# Altium PCB PISCES_200.PCBDOC
Units mm, origin at the board's own origin, x right, y up, seen from the top; angles counter-clockwise.
Board outline 126.04 x 85.33 mm, 4 copper layers (Top Layer, GND, POWER, Bottom Layer); 67 components, 45 nets, 205 pads, 121 vias.
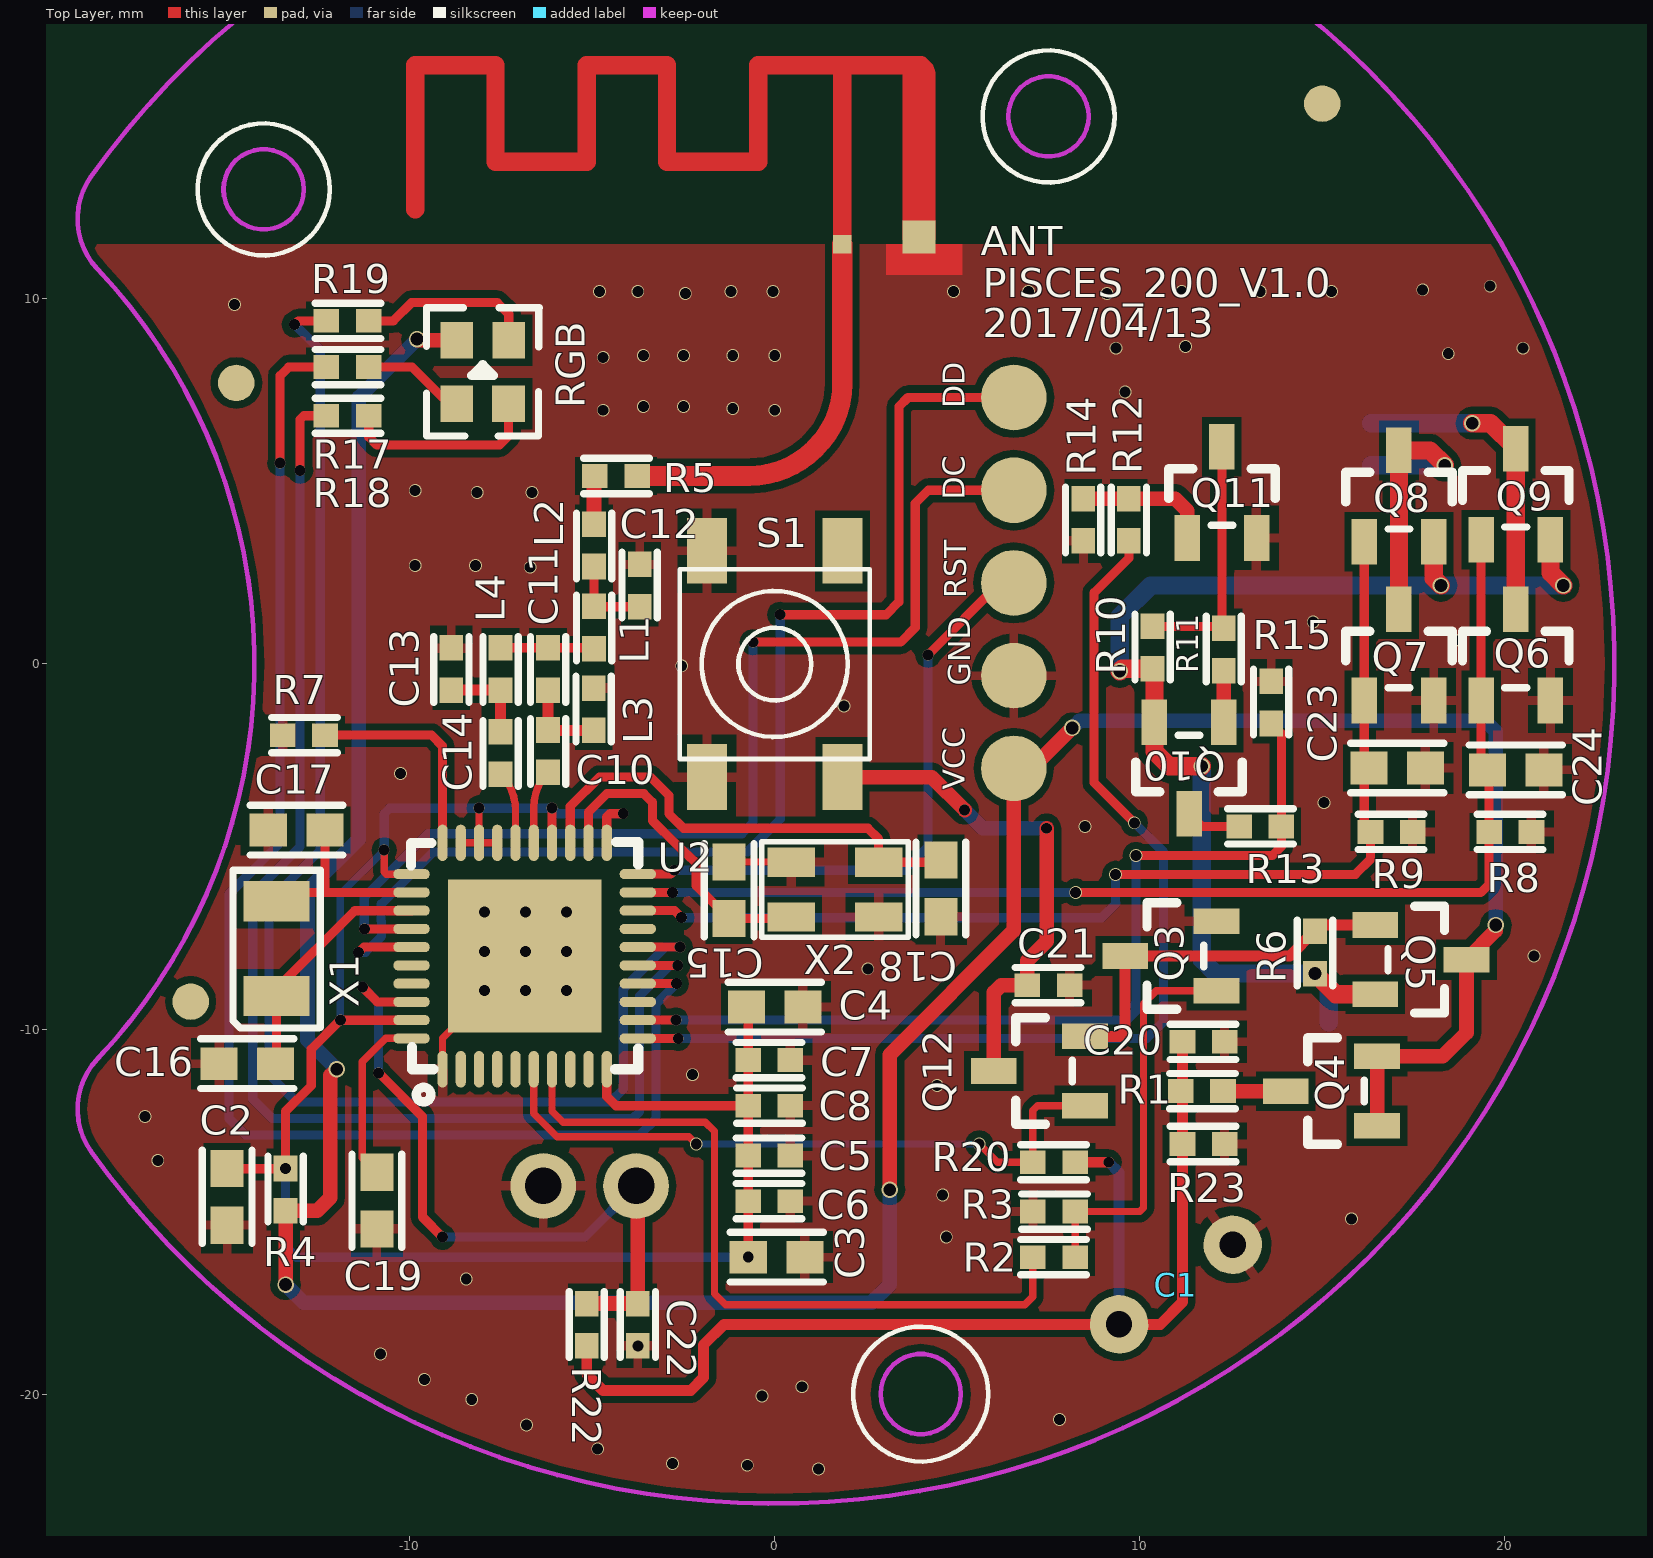
[diagram p0: Top Layer view]
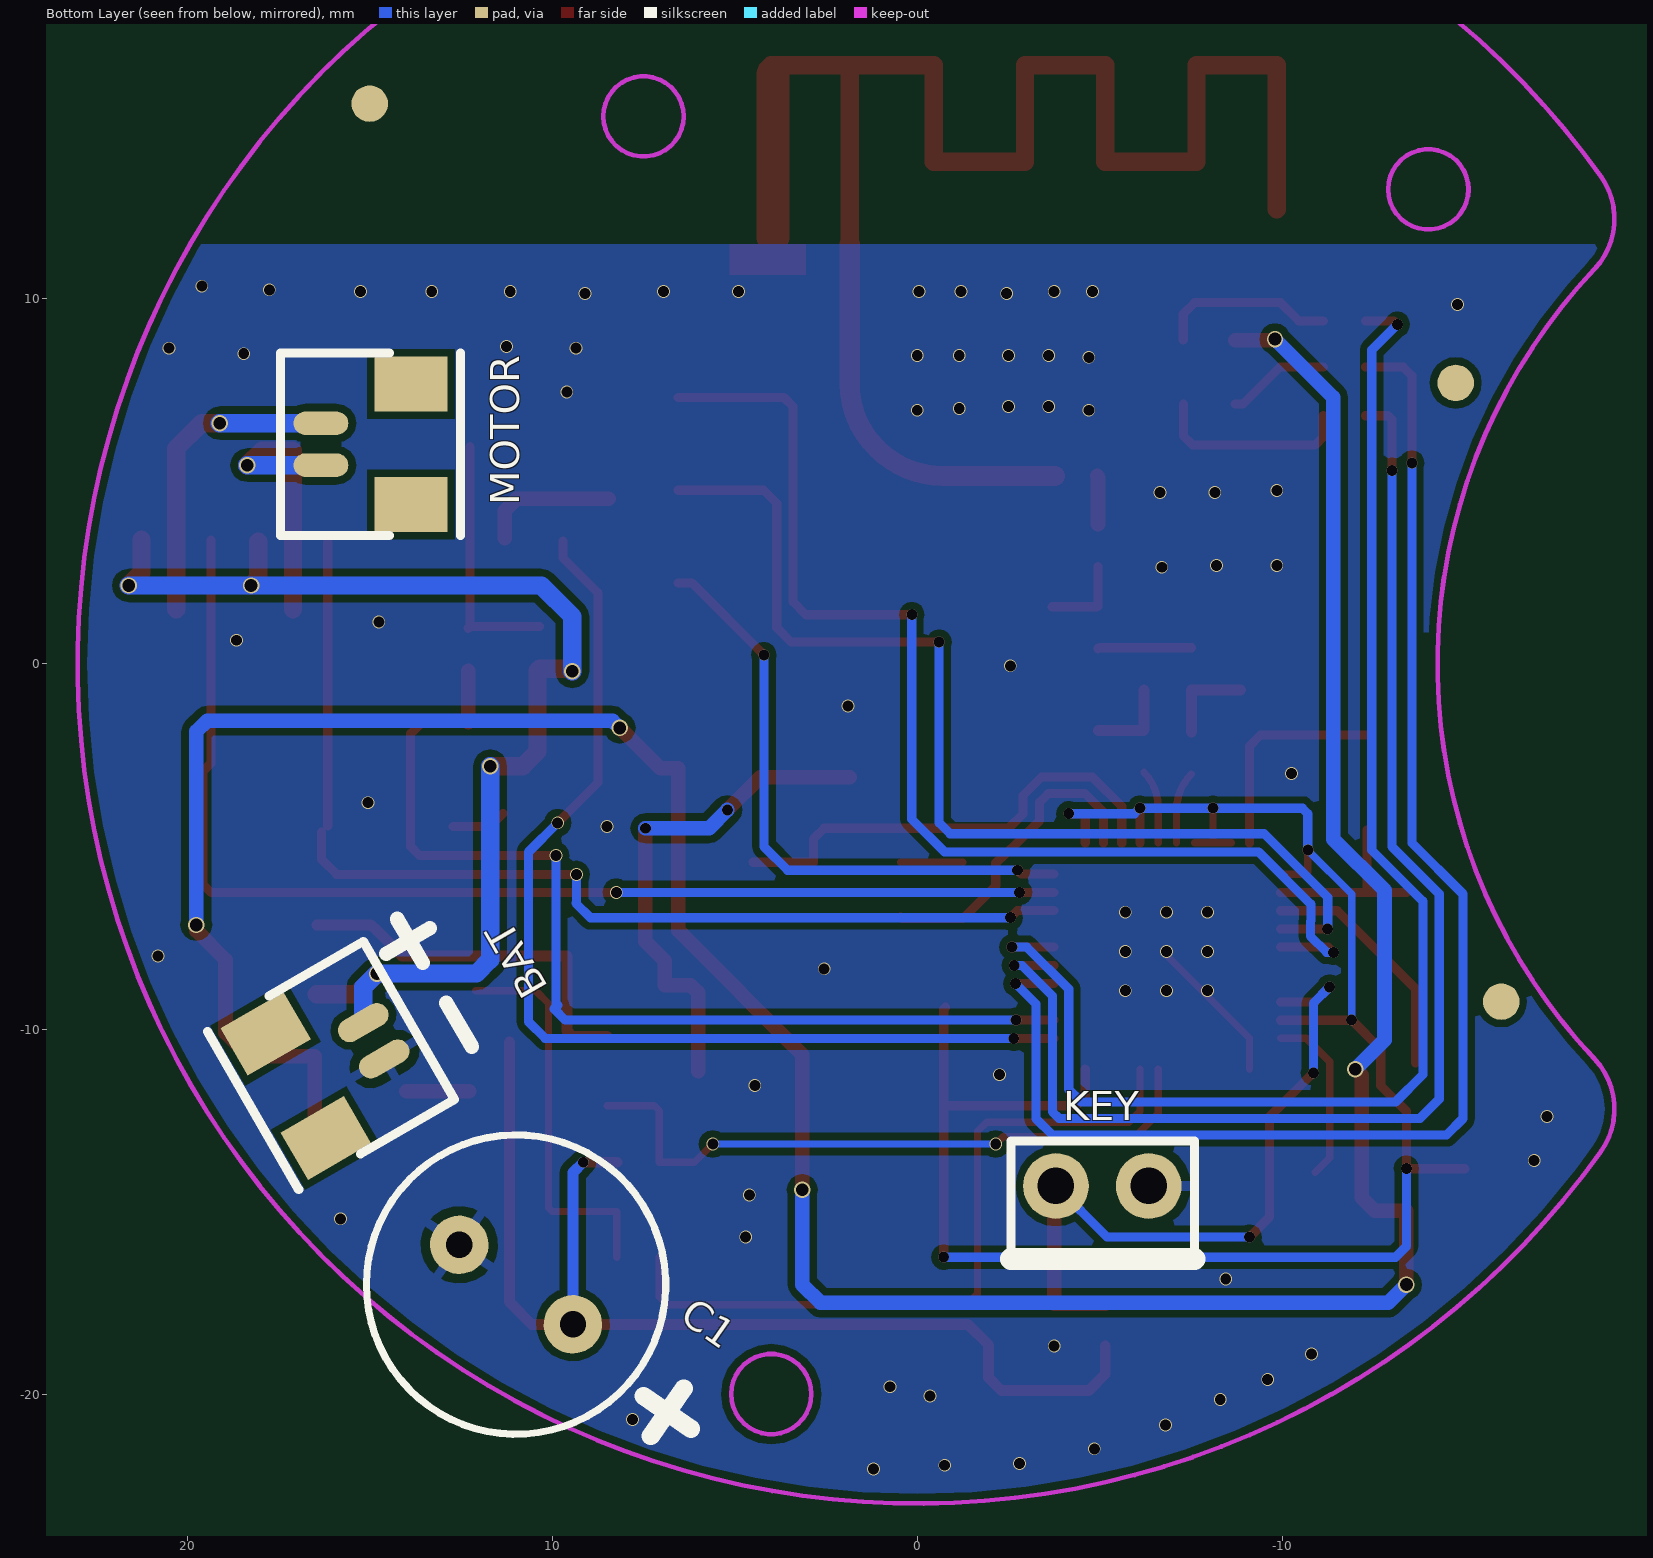
[diagram p1: Bottom Layer view, seen from below]

## Layer stack, top to bottom
Top Solder: solder mask 0.0102, Solder Resist, Dk 3.5
Top Layer: signal copper 0.0356
Dielectric1: core 0.32, FR-4, Dk 4.8
GND: signal copper 0.0356
Dielectric2: prepreg 0.32, FR-4, Dk 4.8
POWER: signal copper 0.0356
Dielectric3: core 0.32, FR-4, Dk 4.8
Bottom Layer: signal copper 0.0356
Bottom Solder: solder mask 0.0102, Solder Resist, Dk 3.5

## Board outline
-72.037,-49.796 -72.037,35.424 53.893,35.424 53.943,35.474 53.963,35.454 53.963,22.144 53.963,-49.826 53.993,-49.856 53.953,-49.816 -72.047,-49.816

## Design rules (kind name [scope] priority, off if disabled: settings)
Clearance [All] p1: gap=0.2
ComponentClearance [All] p1 off: gap=0.254 collisioncheckmode=3 verticalgap=0.254 showdistances=FALSE
FabricationTestPointUsage TestPointUsage [All] p1: valid=0 allowmultiple=FALSE
FabricationTestpoint Testpoint [(IsPad And (OnTopLayer Or OnBottomLayer))] p1: side=3 testpointundercomponent=TRUE minsize=1.016 maxsize=2.54 preferedsize=1.524 minholesize=0 maxholesize=1.016 preferedholesize=0.813 testpointgrid=0.025 allowsidetop=TRUE allowsidebottom=TRUE usegrid=TRUE gridtolerance=0
Height [All] p1 off: minheight=0 maxheight=25.4 prefheight=12.7
PolygonConnect PolygonConnect_1 [IsVia] p1: connectstyle=Direct reliefconductorwidth=0.254 reliefentries=4 polygonreliefangle="90 Angle" airgapwidth=0.254
PolygonConnect [All] p2: connectstyle=Relief reliefconductorwidth=0.254 reliefentries=4 polygonreliefangle="90 Angle" airgapwidth=0.254
RoomDefinition PISCES_200 [InComponentClass('PISCES_200')] p1: confinementstyle=ConfineIn formatcopy=TRUE lockcomponents=FALSE outline -101.086,-174.568 -50.286,-174.568 -50.286,-149.168 -101.086,-149.168
RoutingVias [All] p1: holewidth=0.4 width=0.7 viastyle="Through Hole" minholewidth=0.2 minwidth=0.2 maxholewidth=0.711 maxwidth=1.27
SolderMaskExpansion [All] p1: expansion=0.102
UnpouredPolygon [All] p1: allowunpoured=FALSE
Width [All] p1: maxlimit=1 minlimit=0.2 preferedwidth=0.28 midlayer1_minwidth=0.254 midlayer1_maxwidth=0.254 midlayer1_prefwidth=0.254 midlayer2_minwidth=0.254 midlayer2_maxwidth=0.254 midlayer2_prefwidth=0.254 minimp=50.000000 maximp=50.000000 favimp=50.000000
25 further rules are at their usual default settings.

## Components (designator, comment, footprint, x,y, rotation, side; value= is the part's Value field where it differs from the comment)
ANT "ANT" ANT 1.85,11.5 r180 top (schematic designator ANT2)
BAT "CN1" 2PAD 16.06,-11 r240 bottom
C1 "10V" CAT_ELE 10.99,-17 r35 top
C2 "1uf" PC5-*****-**-0A_0603_TDK -15,-14.6 r270 top
C3 "0.1uf" PC5-*****-**-0A_0603_TDK 0.05,-16.25 r0 top
C4 "0.1uf" PC5-*****-**-0A_0603_TDK 0,-9.4 r0 top
C5 "0.1uf" PC7-*****-KQA0A_0402_YAGEO -0.15,-13.467 r0 top
C6 "0.1uf" PC7-*****-KQA0A_0402_YAGEO -0.15,-14.717 r0 top
C7 "0.1uf" PC7-*****-KQA0A_0402_YAGEO -0.15,-10.85 r0 top
C8 "220pf" PC7-*****-KQA0A_0402_YAGEO -0.15,-12.1 r180 top
C10 "18p" PC7-*****-KQA0A_0402_YAGEO -6.209,-2.389 r90 top
C11 "1p" PC7-*****-KQA0A_0402_YAGEO -6.209,-0.139 r90 top
C12 "1p" PC7-*****-KQA0A_0402_YAGEO -3.7,2.15 r270 top
C13 "1p" PC7-*****-KQA0A_0402_YAGEO -8.859,-0.139 r90 top
C14 "18p" PC7-*****-KQA0A_0402_YAGEO -7.509,-2.439 r90 top
C15 "27p" PC7-*****-KO-0A_0603_TDK -1.25,-6.2 r270 top
C16 "15P" PC5-*****-**-0A_0603_TDK -14.45,-10.95 r0 top
C17 "15P" PC7-*****-KO-0A_0603_TDK -13.1,-4.55 r0 top
C18 "27p" PC7-*****-KO-0A_0603_TDK 4.55,-6.15 r90 top
C19 "1uf" PC5-*****-**-0A_0603_TDK -10.9,-14.7 r90 top
C20 "0.1uf" PC7-*****-KQA0A_0402_YAGEO 11.75,-10.35 r0 top
C21 "0.1uf" PC7-*****-KQA0A_0402_YAGEO 7.5,-8.8 r0 top
C22 "0.1uf" PC7-*****-KQA0A_0402_YAGEO -3.75,-18.1 r270 top
C23 "1uf" PC7-*****-KO-0A_0603_TDK 17.05,-2.85 r0 top
C24 "1uf" PC7-*****-KO-0A_0603_TDK 20.3,-2.9 r180 top
KEY "CN1" KEY_2P -3.8,-14.3 r180 bottom
L1 "1nH" PC5-*****-**-0A_0402_TDK -4.95,1 r90 top
L2 "3nH" PC5-*****-**-0A_0402_TDK -4.95,3.25 r90 top
L3 "2nH" PC5-*****-**-0A_0402_TDK -4.959,-1.239 r270 top
L4 "2nH" PC5-*****-**-0A_0402_TDK -7.509,-0.139 r90 top
MOTOR "CN1" 2PAD 14.98,6.02 r90 bottom locked
Q3 "NPN" SOT-23 10.85,-8 r0 top
Q4 "Q4" SOT-23 15.25,-11.7 r0 top
Q5 "MOSFET-P" SOT-23 17.7,-8.1 r180 top
Q6 "MOSFET-N" SOT-23 20.3,0.25 r270 top
Q7 "MOSFET-N" SOT-23 17.1,0.25 r270 top
Q8 "MOSFET-P" SOT-23 17.1,4.6 r270 top
Q9 "MOSFET-P" SOT-23 20.3,4.65 r270 top
Q10 "PNP" SOT-23 11.35,-2.85 r90 top
Q11 "BC847B" SOT-23 12.25,4.7 r270 top
Q12 "Q12" SOT-23 7.25,-11.15 r0 top
R1 "0R" PC7-*****-KQA0A_0402_YAGEO 11.7,-11.7 r180 top
R2 "10K" PC7-*****-KQA0A_0402_YAGEO 7.65,-16.25 r0 top
R3 "10K" PC7-*****-KQA0A_0402_YAGEO 7.65,-15 r180 top
R4 "0ohm" PC7-*****-KQA0A_0402_YAGEO -13.4,-14.4 r270 top
R5 "0ohm" PC7-*****-KQA0A_0402_YAGEO -4.35,5.15 r180 top
R6 "100K" PC7-*****-KQA0A_0402_YAGEO 14.8,-7.9 r90 top
R7 "56k" PRC-*****-BM-0A_0402 -12.9,-1.95 r180 top
R8 "100K" PC7-*****-KQA0A_0402_YAGEO 20.15,-4.6 r0 top
R9 "100K" PC7-*****-KQA0A_0402_YAGEO 16.9,-4.6 r0 top
R10 "47K" PC7-*****-KQA0A_0402_YAGEO 10.35,0.45 r270 top
R11 "30K" PC7-*****-KQA0A_0402_YAGEO 12.3,0.4 r270 top
R12 "4.7K" PC7-*****-KQA0A_0402_YAGEO 9.7,3.95 r90 top
R13 "2M" PC7-*****-KQA0A_0402_YAGEO 13.3,-4.45 r180 top
R14 "100K" PC7-*****-KQA0A_0402_YAGEO 8.45,3.95 r90 top
R15 "1.5M" PC7-*****-KQA0A_0402_YAGEO 13.6,-1.05 r270 top
R17 "330R" PC7-*****-KQA0A_0402_YAGEO -11.7,8.133 r180 top
R18 "330R" PC7-*****-KQA0A_0402_YAGEO -11.7,6.8 r180 top
R19 "330R" PC7-*****-KQA0A_0402_YAGEO -11.7,9.4 r180 top
R20 "10K" PC7-*****-KQA0A_0402_YAGEO 7.65,-13.65 r0 top
R22 "10K" PC7-*****-KQA0A_0402_YAGEO -5.15,-18.1 r270 top
R23 "4.7K" PC7-*****-KQA0A_0402_YAGEO 11.75,-13.15 r0 top
RGB "RGB" RGB -8,8 r0 top
S1 "SW-PB" TS-030 0,0 r270 top
U2 "CC2541" CC2530_QFN40 -9.109,-11.089 r90 top
X1 "32.768KHZ,F=12.5P" FC-135 -13.65,-7.8 r90 top
X2 "CY_3225" CY_3225 2.75,-6.5 r180 top

## Footprints (in the part's own frame and the unit in brackets; to place one, negate y for a bottom-side part, rotate by r counter-clockwise, add the part's x,y. Pads: shape width x height; smd on the part's side, far side on the other; paste and mask are expansions set on the pad)
2PAD [mm]
  rect 1.5x2 smd: 0(-1.65,-1.115) 0(1.65,-1.115)
  oval 0.65x1.5 smd: 1(-0.575,1.355) 2(0.575,1.355)
  silkscreen extent -2.5,-2.46 2.5,2.47
ANT [mm]
  rect 0.5x0.5 smd: 1(0,0)
  rect 0.9x0.9 smd: 2(-2.1,-0.2)
  Top Layer lines w0.5: 11.7,-0.96 11.7,-4.9 9.5,-4.9 9.5,-2.26 7,-2.26 7,-4.9 4.8,-4.9 4.8,-2.26 2.3,-2.26 2.3,-4.9 0,-4.9 ; 0,0 0,-4.9 ; -2.26,-4.79 -2.21,-4.84 -2.15,-4.9 0,-4.9
  Top Layer lines w0.9: -2.1,-0.2 -2.1,-4.65
CAT_ELE [mm]
  round 1.6 hole 0.72: 1(-1.9,0) 2(1.9,0)
CC2530_QFN40 [mm]
  oval 1x0.28 smd: 1(-0.011,-0.009) 2(-0.011,-0.509) 3(-0.011,-1.009) 4(-0.011,-1.509) 5(-0.011,-2.009) 6(-0.011,-2.509) 7(-0.011,-3.009) 8(-0.011,-3.509) 9(-0.011,-4.009) 10(-0.011,-4.509) 21(6.189,-4.509) 22(6.189,-4.009) 23(6.189,-3.509) 24(6.189,-3.009) 25(6.189,-2.509) 26(6.189,-2.009) 27(6.189,-1.509) 28(6.189,-1.009) 29(6.189,-0.509) 30(6.189,-0.009)
  oval 0.28x1 smd: 11(0.832,-5.359) 12(1.332,-5.359) 13(1.832,-5.359) 14(2.332,-5.359) 15(2.832,-5.359) 16(3.332,-5.359) 17(3.832,-5.359) 18(4.332,-5.359) 19(4.832,-5.359) 20(5.332,-5.359) 31(5.332,0.841) 32(4.832,0.841) 33(4.332,0.841) 34(3.832,0.841) 35(3.332,0.841) 36(2.832,0.841) 37(2.332,0.841) 38(1.832,0.841) 39(1.332,0.841) 40(0.832,0.841)
  rect 4.2x4.2 smd: 41(3.089,-2.259)
  silkscreen extent -0.91,-5.37 6.21,0.85
CY_3225 [mm]
  round 0.5 on Top Overlay: 0(-0.64,-2.06)
  rect 1.3x0.8 smd: 1(-0.095,-1.07) 2(2.293,-1.07) 3(2.293,0.428) 4(-0.095,0.428)
  silkscreen extent -0.91,-1.63 3.11,0.99
FC-135 [mm]
  rect 1.1x1.8 smd: 1(-1.3,0) 2(1.3,0)
  silkscreen extent -2.17,-1.2 2.15,1.19
KEY_2P [mm]
  round 1.8 hole 1: 1(0,0) 2(2.54,0)
  silkscreen extent -1.24,-2 3.79,1.24
PC5-*****-**-0A_0402_TDK [mm] "0402"
  rect 0.7x0.65 smd: 1(-0.58,0) 2(0.58,0)
  silkscreen extent -0.91,-0.48 0.89,0.48
PC5-*****-**-0A_0603_TDK [mm] "0603"
  rect 1.016x0.9 smd: 1(-0.775,0) 2(0.776,0)
  silkscreen extent -1.28,-0.68 1.28,0.68
PC7-*****-KO-0A_0603_TDK [mm] "0603"
  rect 1.016x0.9 smd: 1(-0.776,0) 2(0.776,0)
  silkscreen extent -1.28,-0.68 1.28,0.68
PC7-*****-KQA0A_0402_YAGEO [mm] "0402"
  rect 0.7x0.65 smd: 1(-0.58,0) 2(0.58,0)
  silkscreen extent -0.91,-0.48 0.89,0.48
PRC-*****-BM-0A_0402 [mm] "0402"
  rect 0.7x0.65 smd: 1(-0.58,0) 2(0.58,0)
  silkscreen extent -0.91,-0.48 0.89,0.48
RGB [mm]
  rect 0.9x1 smd: 1(-0.712,0.872) 2(0.713,0.872) 3(0.711,-0.874) 4(-0.712,-0.874)
  silkscreen extent -1.54,-1.76 1.55,1.76
SOT-23 [mm]
  rect 1.25x0.7 smd: 1(1.25,-0.95) 2(1.25,0.95) 3(-1.25,0)
  silkscreen extent -0.65,-1.46 0.9,1.46
TS-030 [mm]
  rect 1.8x1.1 smd: 1(-3.099,1.854) 2(-3.099,-1.854) 3(3.099,-1.854) 4(3.099,1.854)
  silkscreen extent -2.6,-2.6 2.6,2.6

## Part data
BAT KEY MOTOR: library part CON2, "Connector"
C1: library part "Cap Pol2", "Polarized Capacitor (Axial)"
C2 C3 C4 C5 C6 C7 C8 C10 C11 C12 C13 C14 C15 C16 C17 C18 C19 C20 C21 C22 C23 C24: library part PC7_0402_YAGEO, "PC7-*****-KQA0A"
L1 L2 L3 L4: library part PWL_18nH, "PWL-00195-00-20"
Q3: "BC847C"
Q4 Q12: library part BAT54C
Q5 Q8 Q9: "P-Channel MOSFET"
Q6 Q7: "N-Channel MOSFET"
Q10: "BC857C"
Q11: library part NPN, "BC847C"
R1 R2 R3 R5 R6 R8 R9 R17 R18 R19 R20 R22 R23: library part R_Dup3
R4 R7 R10 R11 R12 R13 R14 R15: library part PRC_0603, "PRC-*****-AM-0A_0603"
X1: library part CRYSTAL, "Crystal"

## Free pads (board coordinates)
  round 1 smd: 0(-16,-9.25) 0(-14.75,7.7) 0(15,15.35)
  round 1.8 smd: 0(6.55,-2.86) 1(6.55,-0.32) 2(6.55,2.22) 3(6.55,4.76) 4(6.55,7.3)
  round 1 smd far side: 1(-16,-9.25) 1(-14.75,7.7) 1(15,15.35)

## Via types
v1: diameter 0.35, hole 0.3, Top Layer to Bottom Layer, 79 vias
v2: diameter 0.3, hole 0.3, Top Layer to Bottom Layer, 29 vias
v3: diameter 0.45, hole 0.35, Top Layer to Bottom Layer, 13 vias

## Nets (pads, with @x,y where several pads share a name; then routed paths per layer and width w, separated by ;. In a path a pad name is that pad's centre, name@x,y a point inside that pad or via, vN(x,y) a via of type N, cw(c..) or ccw(c..) an arc to the next point about the centre after c; other vN are vias at no path point)
AD: R13.1 R15.2 U2.12 | length 25.7
  Top Layer w0.25: U2.12 v2(-2.706,-9.756) ; v1(9.9,-5.25) 13.63,-5.25 13.88,-5 R13.1 13.88,-1.91 R15.2
  Bottom Layer w0.25: v2(-2.706,-9.756) 9.644,-9.756 9.95,-9.45 9.85,-9.35 9.9,-9.3 v1(9.9,-5.25)
B: R17.2 U2.14 | length 39.3
  Top Layer w0.25: v2(-13.55,5.5) -13.55,7.9 -13.317,8.133 R17.2 ; U2.14 v2(-2.694,-8.756)
  Bottom Layer w0.25: v2(-13.55,5.5) -13.55,-4.9 -14.95,-6.3 -14.95,-12.45 -14.5,-12.9 -3.7,-12.9 -3.25,-12.45 -3.25,-9.313 v2(-2.694,-8.756)
BAT+: BAT.1 Q5.2 Q8.2 Q9.2 Q10.2 R6.1 R10.2 | length 33.3
  Top Layer w0.5: v3(9.45,-0.2) 9.52,-0.13 R10.2 10.4,-0.18 Q10.2 10.4,-2.4 10.8,-2.8 v3(11.7,-2.8) ; v3(14.8,-8.48) 15.37,-9.05 Q5.2 ; Q8.2 18.05,2.35 v3(18.25,2.15) ; Q9.2 21.25,2.5 v3(21.6,2.15)
  Bottom Layer w0.5: v3(9.45,-0.2) 9.45,1.3 10.3,2.15 v3(18.25,2.15) v3(21.6,2.15) ; v3(11.7,-2.8) 11.7,-8.1 12.08,-8.48 v3(14.8,-8.48) 15.174,-8.854 BAT.1
DC: pad.3 U2.34 | length 29.5
  Top Layer w0.25: v2(-11.244,-7.256) U2.34 ; v2(-0.6,0.6) 3.45,0.6 3.85,1 3.85,4.4 4.21,4.76 pad.3
  Bottom Layer w0.25: v2(-11.244,-7.256) -11.244,-6.394 -9.5,-4.65 -0.9,-4.65 -0.6,-4.35 v2(-0.6,0.6)
DD: pad.4 U2.35 | length 32.7
  Top Layer w0.25: v2(-11.4,-7.9) -11.256,-7.756 U2.35 ; v2(0.15,1.35) 3.05,1.35 3.4,1.7 3.4,7.05 3.65,7.3 pad.4
  Bottom Layer w0.25: v2(-11.4,-7.9) -11.215,-7.9 -10.769,-7.453 -10.769,-7.046 -10.782,-7.033 -10.782,-6.582 -9.35,-5.15 -0.75,-5.15 0.15,-4.25 v2(0.15,1.35)
DJ1: C23.1 Q7.1 Q8.1 R9.1 U2.18 | length 29.8
  Top Layer w0.25: U2.18 -2.744,-6.756 v2(-2.55,-6.95) ; v1(9.335,-5.765) 15.905,-5.765 16.32,-5.35 R9.1 ; R9.1@16.15,-4.43 Q8.1
  Bottom Layer w0.25: v2(-2.55,-6.95) 8.95,-6.95 9.35,-6.55 9.335,-6.535 v1(9.335,-5.765)
DJ2: C24.2 Q6.1 Q9.1 R8.1 U2.19 | length 32.9
  Top Layer w0.25: U2.19 v2(-2.806,-6.256) ; v1(8.244,-6.256) 8.252,-6.265 19.335,-6.265 19.57,-6.03 R8.1 19.57,-2.946 C24.2 19.35,-2.726 Q9.1
  Bottom Layer w0.25: v2(-2.806,-6.256) v1(8.244,-6.256)
G: R18.2 U2.15 | length 36.5
  Top Layer w0.25: v2(-13,5.3) -13,6.7 -12.9,6.8 R18.2 ; U2.15 v2(-2.656,-8.256)
  Bottom Layer w0.25: v2(-13,5.3) -13,-5 -14.3,-6.3 -14.3,-11.917 -13.767,-12.45 -3.886,-12.45 -3.7,-12.264 -3.7,-9.091 -2.865,-8.256 v2(-2.656,-8.256)
GND: ANT.2 BAT.2 C1.2 C2.2 C3.2 C4.2 C5.2 C6.2 C7.2 C8.1 C12.1 C13.2 C15.1 C16.1 C17.1 C18.1 C19.1 C20.2 C21.2 C22.2 C23.2 C24.1 KEY.2 L3.1 pad.1@6.55,-0.32 Q3.2 Q6.2 Q7.2 Q11.2 R3.2 R7.2 R8.2 R9.2 R14.1 R15.1 R23.2 S1.2 S1.3 U2.1 U2.41 X2.2 X2.4 | length 5.7
  Top Layer w0.2: U2.1 -9.1,-10.25 U2.41 ; C15.1@-1.25,-5.43 C15.1 0.457,-5.425 X2.2
  other v1: 1.2,-22.05 -0.75,-21.95 -2.8,-21.9 -4.85,-21.5 -6.8,-20.85 7.8,-20.7 -8.3,-20.15 -0.35,-20.05 0.75,-19.8 -9.6,-19.6 -10.8,-18.9 -3.75,-18.68 -8.45,-16.85 4.7,-15.7 15.8,-15.2 4.6,-14.55 -16.9,-13.6 -17.25,-12.4 4.45,-11.55 -2.25,-11.25 -7.95,-8.95 -6.825,-8.95 -5.7,-8.95 2.55,-8.35 20.8,-8 -7.95,-7.875 -6.825,-7.875 -5.7,-7.875 -7.95,-6.8 -6.825,-6.8 -5.7,-6.8 8.5,-4.45 15.05,-3.8 -10.25,-3 1.9,-1.15 -2.55,-0.05 18.65,0.65 14.75,1.15 -6.7,2.65 -9.85,2.7 -8.2,2.7 -8.15,4.7 -6.65,4.7 -9.85,4.75 -4.7,6.95 0,6.95 -1.15,7 -3.6,7.05 -2.5,7.05 9.6,7.45 -4.7,8.4 -3.6,8.45 -2.5,8.45 -1.15,8.45 0,8.45 18.45,8.5 9.35,8.65 20.5,8.65 11.25,8.7 -14.8,9.85 -2.45,10.15 9.1,10.15 -4.8,10.2 -3.75,10.2 -1.2,10.2 -0.05,10.2 4.9,10.2 6.95,10.2 11.15,10.2 13.3,10.2 15.25,10.2 17.75,10.25 19.6,10.35
ISR_INPUT: Q12.1 R20.1 U2.6 | length 18.3
  Top Layer w0.2: U2.6 -6.6,-12.316 -5.966,-12.95 -2.35,-12.95 v1(-2.15,-13.15) ; v1(5.6,-13.15) 6.1,-13.65 R20.1 7.07,-12.23 7.2,-12.1 Q12.1
  Bottom Layer w0.2: v1(-2.15,-13.15) v1(5.6,-13.15)
KEEP_HIGH: R2.1 U2.7 | length 20.3
  Top Layer w0.2: U2.7 -6.1,-12.25 -5.8,-12.55 -1.9,-12.55 -1.65,-12.8 -1.65,-17.25 -1.35,-17.55 6.85,-17.55 7.07,-17.33 R2.1
NetANT_1: ANT.1 R5.1 | length 10.9
  Top Layer w0.55: R5.1 -0.702,5.15 ccw(c-0.702,7.69) 1.094,5.894 1.132,5.932 ccw(c-0.6,7.665) 1.85,7.665 ANT.1
NetC1_1: C1.1 C20.1 R1.2 R20.2 R22.2 R23.1 | length 31.4
  Top Layer w0.3: R22.2 -5.15,-19.45 -4.7,-19.9 -2.3,-19.9 -1.95,-19.55 -1.95,-18.65 -1.39,-18.09 C1.1 10.56,-18.09 11.17,-17.48 R23.1 C20.1 ; R20.2 v2(9.15,-13.65)
  Bottom Layer w0.3: v2(9.15,-13.65) 9.434,-13.934 C1.1
NetC2_1: C2.1 C3.1 C4.1 C5.1 C6.1 C7.1 C8.2 R4.1 U2.10 U2.21 U2.24 U2.27 U2.28 U2.29 U2.31 U2.39 | length 53.1
  Top Layer w0.2: v2(-10.7,-5.1) -10.7,-5.7 -10.644,-5.756 U2.31 ; U2.29 U2.27 ; U2.28 v2(-8.1,-3.95)
  Top Layer w0.254: C2.1 -13.405,-13.825 v2(-13.4,-13.82) -13.4,-12.25 -12.7,-11.55 -12.7,-10.55 -11.906,-9.756 U2.39 ; U2.24 v2(-6.1,-3.95) ; U2.10 -4.6,-11.85 -4.35,-12.1 C8.2 ; U2.21 -4.6,-4.189 -4.513,-4.102 v2(-4.15,-4.102) ; C4.1 -0.725,-9.45 -0.725,-12.1 v2(-0.725,-16.25)
  Bottom Layer w0.2: v2@-11.906,-9.756 -11.9,-9.75 -11.9,-6.3 v2(-10.7,-5.1)
  Bottom Layer w0.254: v2(-13.4,-13.82) -13.4,-15.95 -13.1,-16.25 v2(-0.725,-16.25) ; v2(-10.7,-5.1) -10.7,-4.1 -10.55,-3.95 v2(-8.1,-3.95) v2(-6.1,-3.95) -5.948,-4.102 v2(-4.15,-4.102)
  other v2: -11.9,-9.756
NetC10_1: C10.1 U2.25 | length 2
  Top Layer w0.2: U2.25 -6.6,-3.912 cw(c-5.266,-3.912) C10.1
NetC10_2: C10.2 C11.1 L3.2 | length 2.3
  Top Layer w0.3: C11.1 C10.2 ccw(c-6.185,-1.785) -6.185,-1.819 L3.2
NetC11_2: C11.2 L1.1 L4.2 | length 3.8
  Top Layer w0.2: C11.2 L1.1@-5.001,0.441
  Top Layer w0.254: L4.2 -5.001,0.441 cw(c-5.001,0.369) L1.1
NetC12_2: C12.2 L1.2 L2.1 | length 2.3
  Top Layer w0.254: L2.1 L1.2 ccw(c-4.926,1.604) -4.926,1.57 C12.2
NetC13_1: C13.1 C14.2 L4.1 | length 2.5
  Top Layer w0.3: C13.1 L4.1 C14.2
NetC14_1: C14.1 U2.26 | length 2
  Top Layer w0.2: C14.1 cw(c-8.498,-4.007) -7.1,-4.007 U2.26
NetC15_2: C15.2 U2.22 X2.3 | length 8.7
  Top Layer w0.25: U2.22 -5.1,-4.05 -4.6,-3.55 -3.586,-3.55 -3.35,-3.786 -3.35,-4.286 -2.686,-4.95 -2.15,-5.45 -2.15,-6.076 C15.2 0.41,-6.976 X2.3
NetC16_2: C16.2 U2.33 X1.1 | length 6.6
  Top Layer w0.254: C16.2@-13.65,-10.926 X1.1 -13.65,-8.9 -11.506,-6.756 U2.33
NetC17_2: C17.2 U2.32 X1.2 | length 5.1
  Top Layer w0.25: X1.2@-13.406,-6.256 U2.32 ; -12.324,-6.232 C17.2
NetC18_2: C18.2 U2.23 X2.1 | length 13.1
  Top Layer w0.25: U2.23 -5.6,-3.9 -4.8,-3.1 -3.4,-3.1 -2.9,-3.6 -2.9,-4.1 -2.5,-4.5 2.55,-4.5 2.845,-4.795 X2.1 C18.2@4.495,-5.43
NetC19_2: C19.2 U2.40 | length 4.8
  Top Layer w0.2: C19.2 -11.3,-13.524 -11.3,-10.9 -10.656,-10.256 U2.40
NetC21_1: C21.1 Q12.3 S1.4 | length 13.8
  Top Layer w0.4: S1.4 4.299,-3.099 v2(5.2,-4) ; Q12.3 6,-9 6.2,-8.8 C21.1 6.92,-8.13 7.45,-7.6 v2(7.45,-4.5)
  Bottom Layer w0.4: v2(5.2,-4) 5.7,-4.5 v2(7.45,-4.5)
NetL2_2: L2.2 R5.2 | length 1.3
  Top Layer w0.4: L2.2 -4.95,5.102 cw(c-4.882,5.102) R5.2
NetMOTOR_1: MOTOR.1 Q7.3 Q8.3 | length 7.8
  Top Layer w0.5: Q7.3 Q8.3 17.95,5.85 v3(18.355,5.445)
  Bottom Layer w0.5: MOTOR.1 v3(18.355,5.445)
NetMOTOR_2: MOTOR.2 Q6.3 Q9.3 | length 8.7
  Top Layer w0.5: v3(19.105,6.595) 19.605,6.595 Q9.3 Q6.3
  Bottom Layer w0.5: MOTOR.2 v3(19.105,6.595)
NetQ3_1: Q3.1 R2.2 R3.1 | length 10.9
  Top Layer w0.2: R2.2 R3.1 10,-15 10.1,-14.9 10.1,-9.3 10.45,-8.95 Q3.1
NetQ4_3: Q4.3 R1.1 | length 1.7
  Top Layer w0.4: R1.1 Q4.3
NetQ10_1: Q10.1 R11.2 | length 1.4
  Top Layer w0.4: Q10.1 R11.2
NetQ10_3: Q10.3 R13.2 | length 1.5
  Top Layer w0.25: Q10.3 11.7,-4.45 R13.2
NetQ11_1: Q11.1 R12.2 R14.2 | length 3.7
  Top Layer w0.4: R14.2 R12.2 10.97,4.53 11.3,4.2 Q11.1
NetQ11_3: Q11.3 R10.1 R11.1 | length 6.9
  Top Layer w0.25: R10.1 R11.1@12.25,1.03 ; Q11.3 R11.1@12.25,1.03 ; R11.1 R11.1@12.25,1.03
NetR7_1: R7.1 U2.30 | length 6
  Top Layer w0.25: R7.1 -9.4,-1.95 -9.1,-2.25 U2.30
NetR17_1: R17.1 RGB.4 | length 2.8
  Top Layer w0.25: R17.1 -9.933,8.133 -8.926,7.126 RGB.4
NetR18_1: R18.1 RGB.3 | length 5.5
  Top Layer w0.25: R18.1 -11.12,6.22 -10.9,6 -7.543,6 -7.289,6.255 RGB.3
NetR19_1: R19.1 RGB.2 | length 4.9
  Top Layer w0.25: R19.1 -10.45,9.4 -9.95,9.9 -7.6,9.9 -7.287,9.587 RGB.2
P10: R12.1 U2.11 | length 28.9
  Top Layer w0.25: U2.11 v2(-2.644,-10.256) ; R12.1 9.7,2.9 8.75,1.95 8.75,-3.25 v1(9.85,-4.35)
  Bottom Layer w0.25: v2(-2.644,-10.256) 10.194,-10.256 10.65,-9.8 10.65,-5.15 v1(9.85,-4.35)
Q5_1: Q3.3 Q5.1 Q12.2 R6.2 | length 10.4
  Top Layer w0.3: Q12.2 9.45,-10.2 9.6,-10.05 Q3.3 14.11,-8 R6.2@14.79,-7.32 ; R6.2 R6.2@14.79,-7.32 ; Q5.1 14.96,-7.15 R6.2@14.79,-7.32
R: R19.2 U2.16 | length 38.4
  Top Layer w0.25: v2(-13.15,9.3) -13.05,9.4 R19.2 ; U2.16 v2(-2.594,-7.756)
  Bottom Layer w0.25: v2(-13.15,9.3) -12.45,8.6 -12.45,-5.1 -13.85,-6.5 -13.85,-11.25 -13.1,-12 -4.5,-12 -4.15,-11.65 -4.15,-8.905 -3.002,-7.756 v2(-2.594,-7.756)
RST: pad.2 U2.20 | length 16.7
  Top Layer w0.25: U2.20 -2.856,-5.756 v2(-2.75,-5.65) ; v2(4.2,0.25) 6.17,2.22 pad.2
  Bottom Layer w0.25: v2(-2.75,-5.65) 3.55,-5.65 4.2,-5 v2(4.2,0.25)
S1: C22.1 KEY.1 R22.1 U2.38 | length 19.8
  Top Layer w0.25: v2(-11.294,-8.85) -10.887,-9.256 U2.38 ; v2(-10.85,-11.2) -9.65,-12.4 -9.65,-15.15 v2(-9.1,-15.7)
  Top Layer w0.4: R22.1 C22.1 -3.75,-14.35 KEY.1
  Bottom Layer w0.25: v2(-11.294,-8.85) -10.85,-9.294 v2(-10.85,-11.2) ; v2(-9.1,-15.7) -5.2,-15.7 KEY.1
VCC3V: pad.0@6.55,-2.86 Q4.1 Q4.2 Q5.3 R4.2 RGB.1 | length 89.2
  Top Layer w0.4: v3(-13.4,-17) R4.2 -12.53,-14.98 -12.173,-14.623 -12.173,-11.273 v3(-12,-11.1) ; v3(-9.8,8.9) -9.772,8.872 RGB.1 ; v3(3.15,-14.4) 3.15,-10.7 6.55,-7.3 6.55,-2.86 7.04,-2.86 v3(8.15,-1.75) ; Q4.1 Q4.2 18.3,-10.75 18.95,-10.1 Q5.3 19.75,-7.3 v3@19.75,-7.2
  Bottom Layer w0.4: v3(-13.4,-17) -12.9,-17.5 2.65,-17.5 3.15,-17 v3(3.15,-14.4) ; v3(-12,-11.1) -12.8,-10.3 -12.8,-6.2 -11.4,-4.8 -11.4,7.3 v3(-9.8,8.9) ; v3(8.15,-1.75) 8.35,-1.55 19.45,-1.55 19.75,-1.85 v3(19.75,-7.15)
pads on no net: BAT.0 MOTOR.0 S1.1 U2.2 U2.3 U2.4 U2.5 U2.8 U2.9 U2.13 U2.17 U2.36 U2.37 X2.0

## Polygon pours and split planes (outlines as drawn)
GND on Top Layer "Top Layer-No Net" (solid, remove dead copper, pour order 10): 4.654,11.5 5.65,11.5 23.6,11.5 23.6,-5.4 23.6,-23.4 -7.8,-23.4 -19.75,-23.4 -19.75,11.5
GND on Bottom Layer "Top Layer-No Net" (solid, remove dead copper, pour order 12): -19.75,11.5 23.6,11.5 23.6,-23.4 -19.75,-23.4

## Keep-outs
Keep-Out Layer:
  circle w0.127: c7.5,15 r1.1
  circle w0.127: c-14,13 r1.1
  circle w0.127: c4,-20 r1.1
  lines w0.127: -18.728,-13.352 cw(c-17.099,-12.191) -18.553,-10.817 ccw(c-30,0) -18.553,10.818 cw(c-17.099,12.192) -18.728,13.353 cw(c0,0) -18.728,-13.352

## Other copper
Top Layer:
  rectangle net GND: 3.042,10.65 5.15,11.5
  rectangle net GND: 3.246,10.996 4.654,11.5

## Silkscreen, mask and mechanical layers (free items; w line width, h text height)
Top Overlay:
  circle w0.127: c-14,13 r1.81
  circle w0.127: c4,-20 r1.85
  circle w0.127: c7.5,15 r1.81
  circle w0.127: c0,0 r2
  text "PISCES_200_V1.0" at 5.7,10.05 h0.8
  text "2017/04/13" at 5.7,8.95 h0.8
  text "DD" at 5.2,7 h0.6 r90
  text "DC" at 5.2,4.5 h0.6 r90
  text "RST" at 5.25,1.8 h0.6 r90
  text "GND" at 5.35,-0.6 h0.6 r90
  text "VCC" at 5.2,-3.45 h0.6 r90
Bottom Overlay:
  circle w0.127: c10.99,-17 r4.1
  lines w0.4: 12.2,-10.486 12.9,-9.286 ; 13.35,-7.236 14.55,-7.936 ; 13.55,-8.186 14.25,-6.986
  lines w0.5: 6.2,-20.95 7.5,-20.05 ; 6.4,-19.85 7.3,-21.15